# Altium PCB CTR-Dome-Rev-B.PcbDoc
Units mil, origin at the board's own origin, x right, y up, seen from the top; angles counter-clockwise.
Board outline 2755.91 x 2755.91 mil, 2 copper layers (Top Layer, Bottom Layer), stack 30.2 mil thick; 54 components, 36 nets, 180 pads, 50 vias.
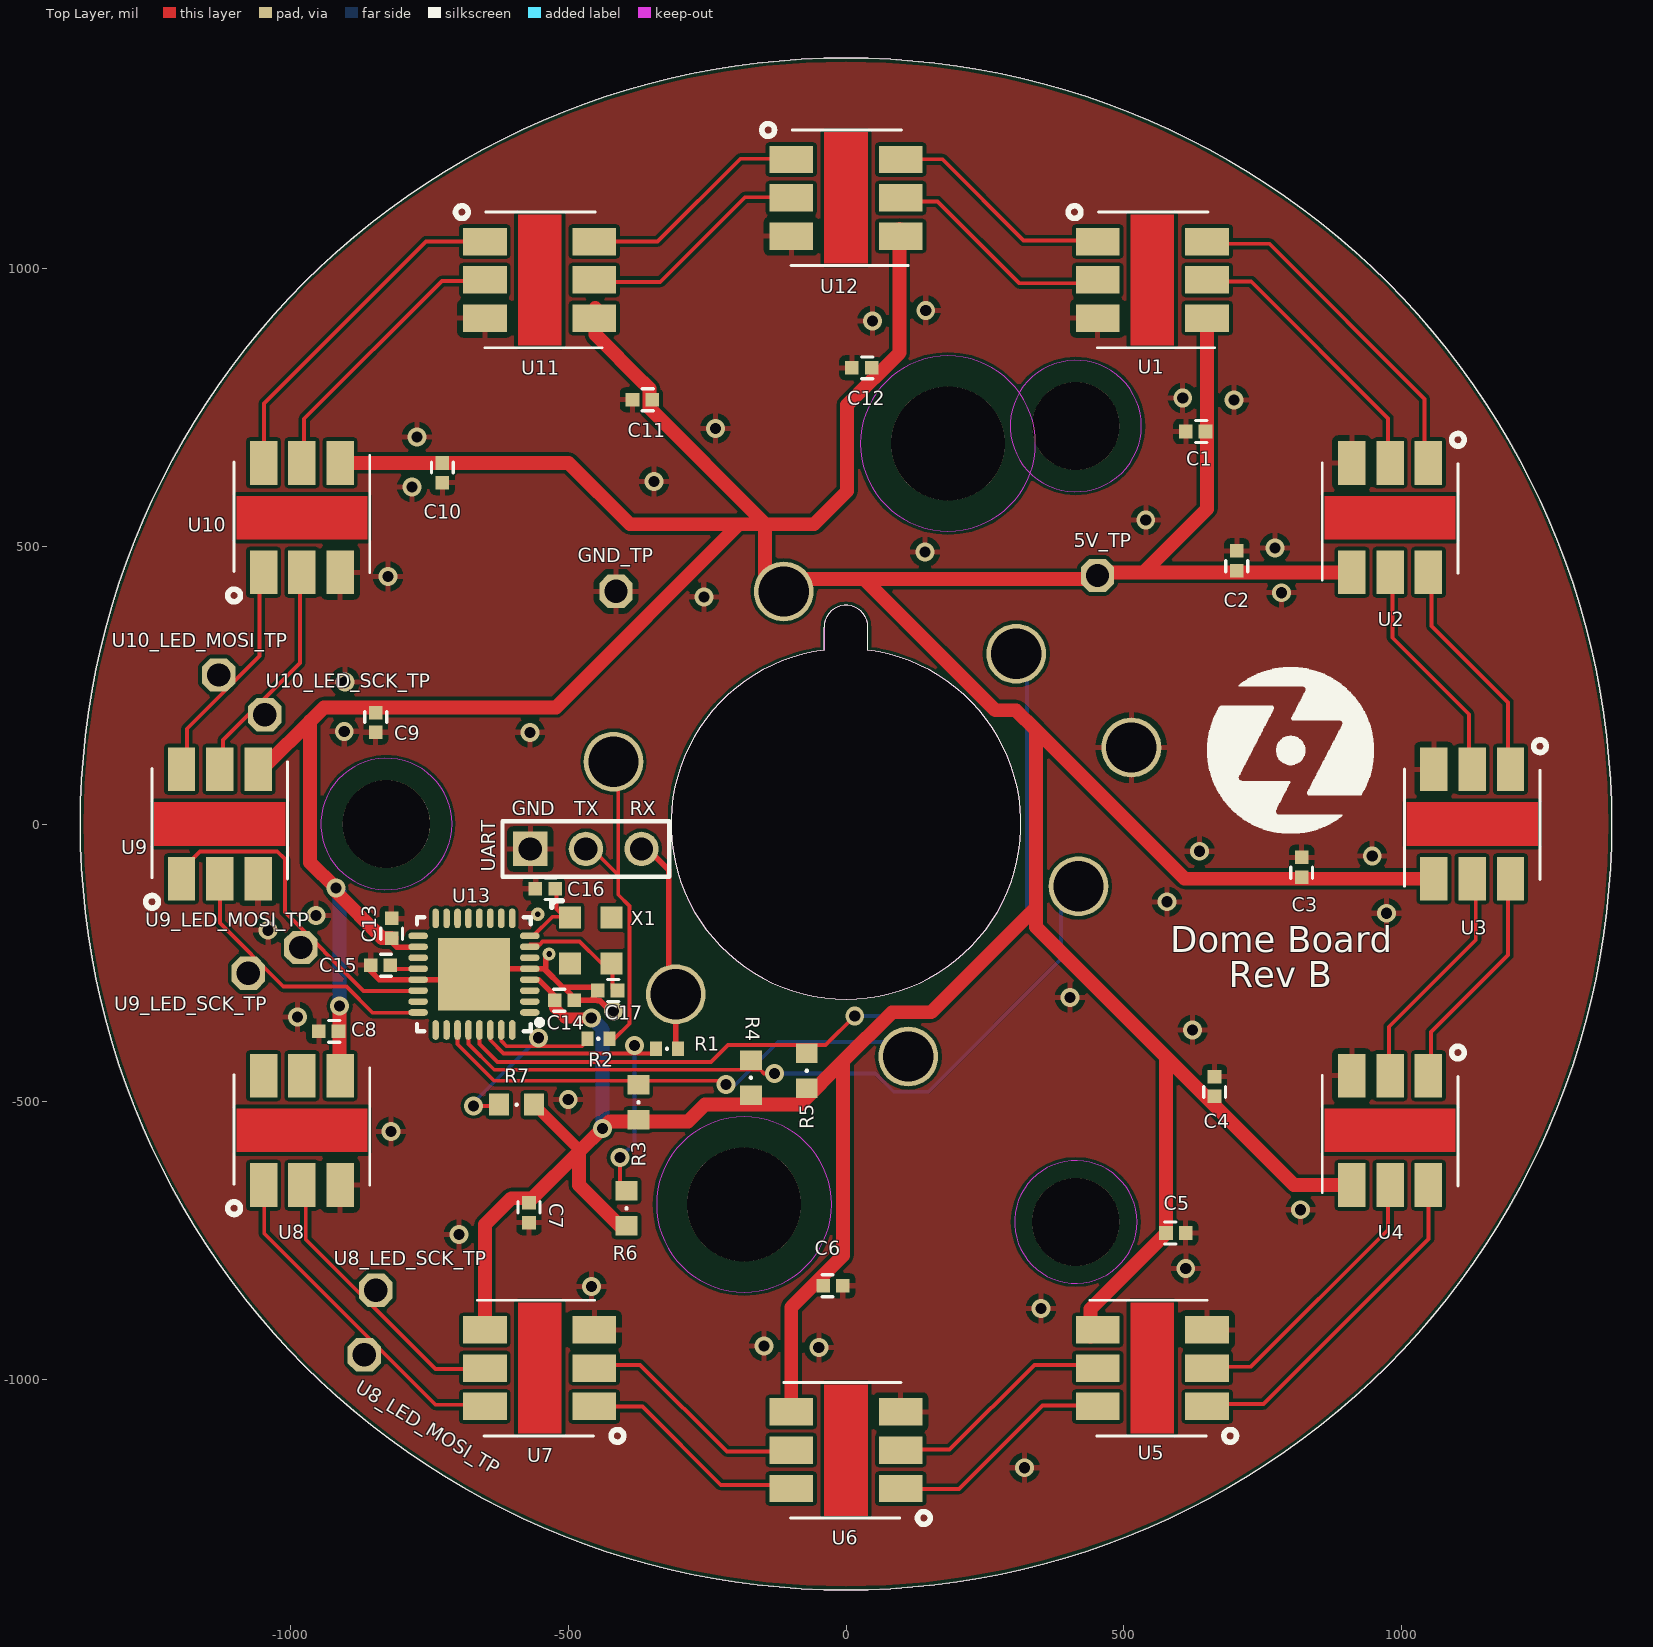
[diagram p0: Top Layer view]
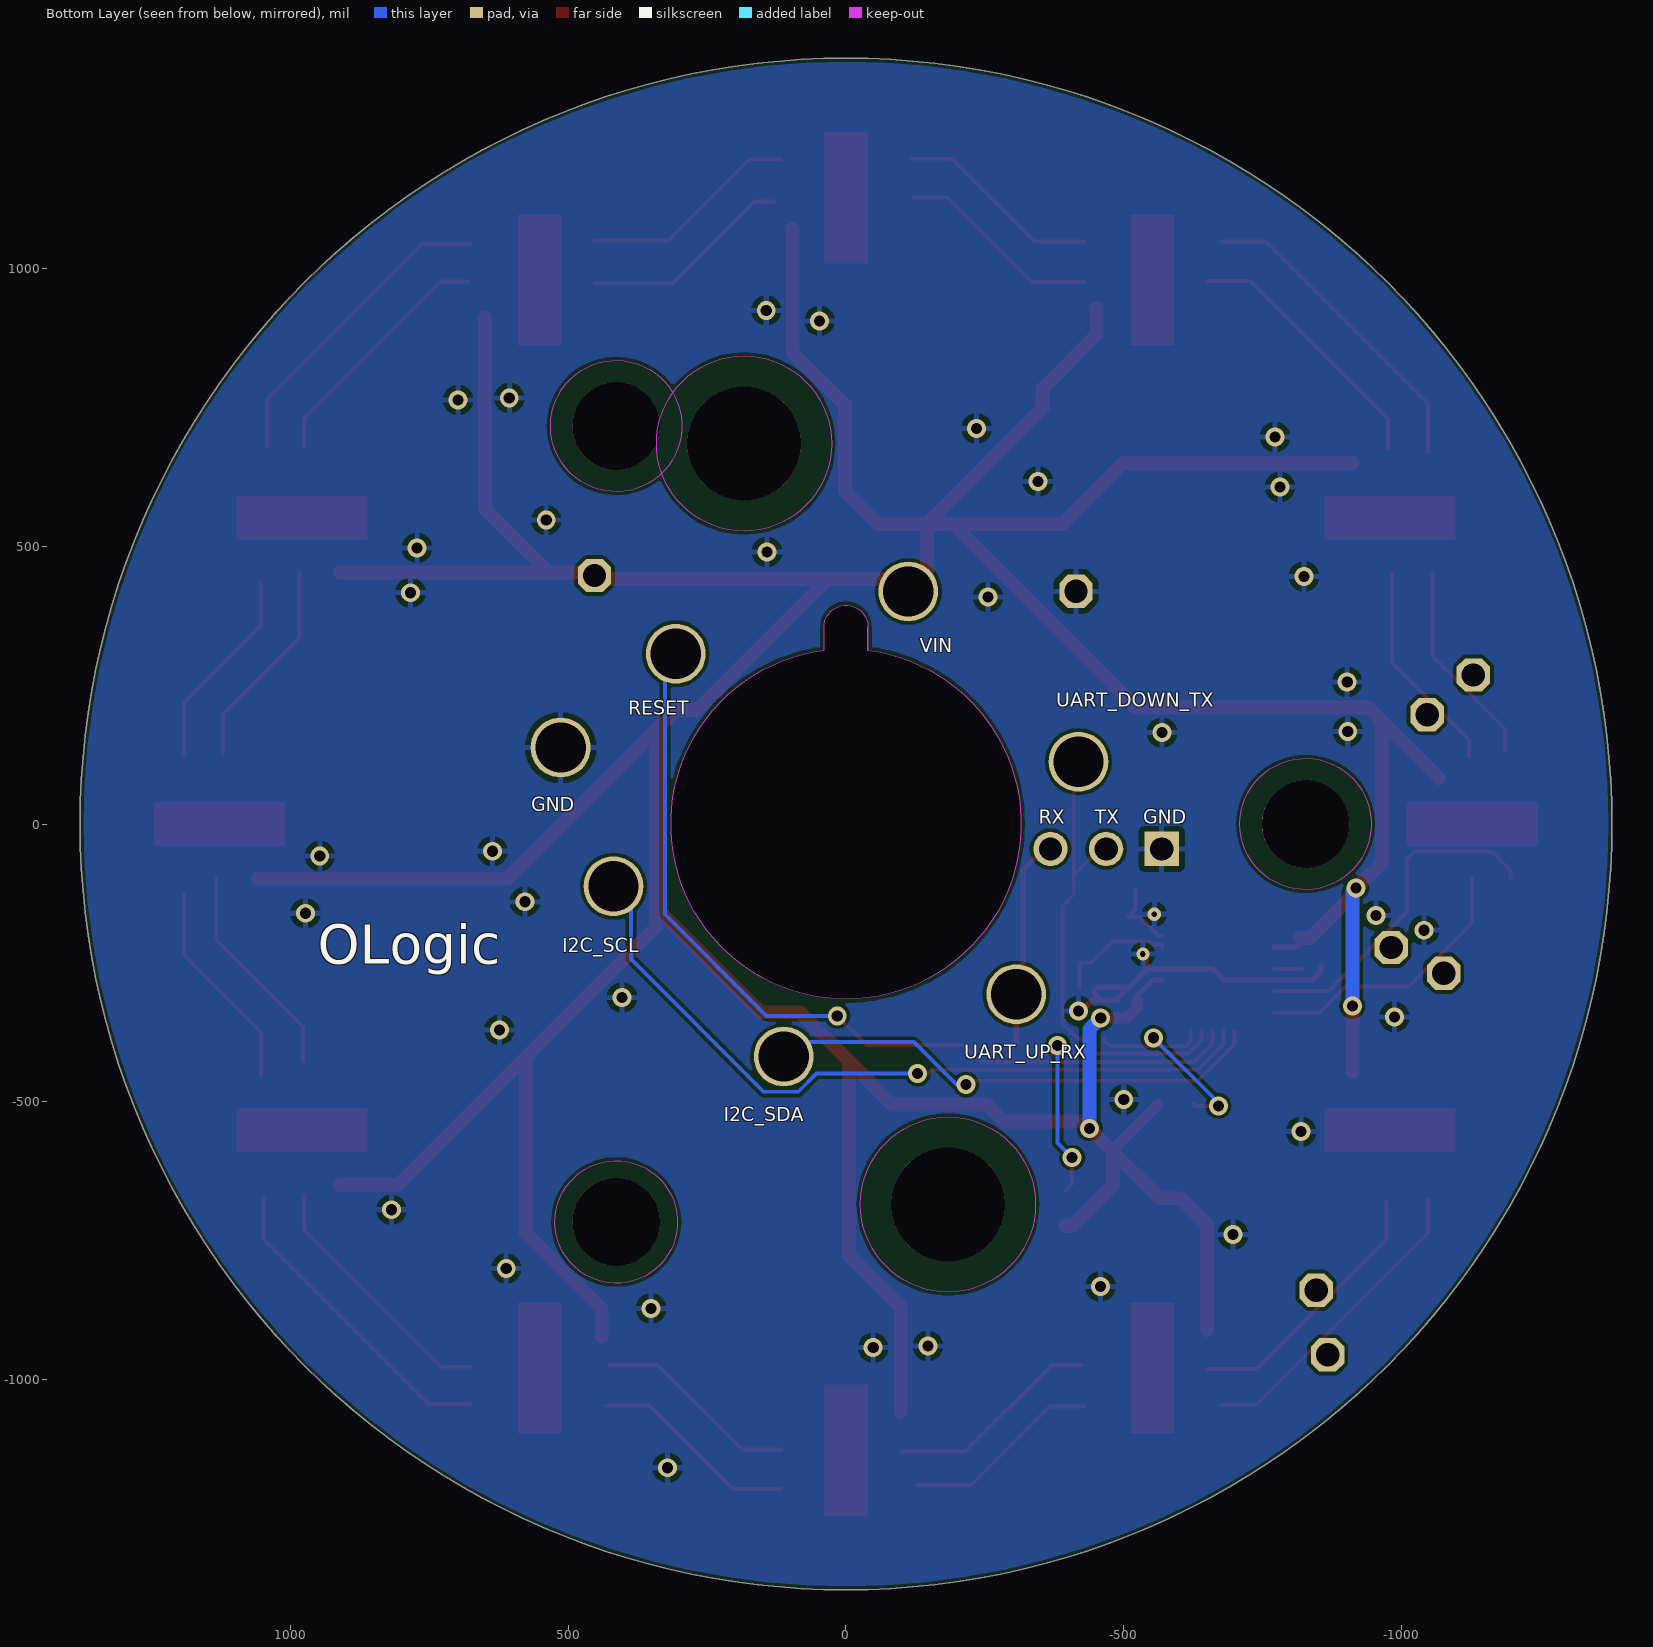
[diagram p1: Bottom Layer view, seen from below]

## Layer stack, top to bottom
Top Solder: solder mask 0.4, Solder Resist, Dk 3.5
Top Layer: signal copper 1.8
Dielectric1: core 26.6, Dk 4.2
Bottom Layer: signal copper 1.8
Bottom Solder: solder mask 0.4, Solder Resist, Dk 3.5

## Board outline
-1377.95,0 ccw(c0,0) 0,-1377.95 ccw(c0,0) 1377.95,0 ccw(c0,0) 0,1377.95 ccw(c0,0)
cut-out: -39.37,312.49 ccw(c0,0) 39.37,312.49 39.37,354.33 ccw(c0,354.33) -39.37,354.33

## Design rules (kind name [scope] priority, off if disabled: settings)
Clearance [All] p1: gap=6 ignorepadtopadclearanceinfootprint=FALSE except(0: Arc-Hole Track-Hole SMDPad-Hole THPad-Hole Via-Hole Fill-Hole Poly-Hole Region-Hole Text-Hole)
ComponentClearance ComponentClearance_BAT [InComponent('BT1') vs InComponent('CN3')] p1: gap=0 collisioncheckmode=3 verticalgap=0 showdistances=FALSE
ComponentClearance [All] p2: gap=7 collisioncheckmode=3 verticalgap=7 showdistances=FALSE
HoleSize [All] p1: absolutevalues=TRUE maxlimit=300 minlimit=10 maxpercent=80.000 minpercent=20.000
HoleToHoleClearance [All] p1: gap=7 allowstackedmicrovias=TRUE
MinimumSolderMaskSliver [InNet('VIN')] p1: minsoldermaskwidth=0.5
NetAntennae NetAntennae_ANT [InNetClass('ANT')] p1: netantennaetolerance=0
NetAntennae [All] p2: netantennaetolerance=0
PolygonConnect [All] p1: connectstyle=Relief reliefconductorwidth=10 reliefentries=4 polygonreliefangle="90 Angle" airgapwidth=10
RoutingVias [All] p1: holewidth=20 width=34 viastyle="Through Hole" minholewidth=10 minwidth=22 maxholewidth=35 maxwidth=50
SMDNeckDown [All] p1: percent=120.000
SilkToBoardRegionClearance [InNet('3.3V')] p1:
SilkToSilkClearance [All] p1: silktosilkclearance=0
SilkToSolderMaskClearance [IsPad] p1: minsilkscreentomaskgap=0 clearancetoexposedcopper=TRUE
SolderMaskExpansion [All] p1: expansion=4
Width Width_BT [InNetClass('BT')] p1: maxlimit=40 minlimit=10 preferedwidth=15
Width Width_VDD [InNet('3.3V')] p2: maxlimit=20 minlimit=7 preferedwidth=10
Width [All] p3: maxlimit=30 minlimit=6 preferedwidth=7
22 further rules are at their usual default settings.

## Classes and differential pairs
component class LED: C1 C2 C3 C4 C5 C6 C7 C8 C9 C10 C11 C12 C13 U1 U2 U3 U4 U5 U6 U7 U8 U9 U10 U11 U12

## Components (designator, comment, footprint, x,y, rotation, side; value= is the part's Value field where it differs from the comment)
5V_TP "Test Point" "TestPoint-TH 42 mil" 452.44,446.96 r90 top
C1 "1uF" CAPC0402(1005)_N 629.08,706.17 r180 top
C2 "1uF" CAPC0402(1005)_N 703.17,473.68 r90 top
C3 "1uF" CAPC0402(1005)_N 819.68,-77.87 r90 top
C4 "1uF" CAPC0402(1005)_N 663.03,-472.31 r90 top
C5 "1uF" CAPC0402(1005)_N 593.42,-735.87 r0 top
C6 "1uF" CAPC0402(1005)_N -23.57,-830.71 r0 top
C7 "1uF" CAPC0402(1005)_N -570.3,-699.44 r270 top
C8 "1uF" CAPC0402(1005)_N -930.72,-373.15 r180 top
C9 "1uF" CAPC0402(1005)_N -846.14,182.48 r270 top
C10 "1uF" CAPC0402(1005)_N -726.15,631.72 r270 top
C11 "1uF" CAPC0402(1005)_N -366.43,763.42 r180 top
C12 "1uF" CAPC0402(1005)_N 28.25,820.63 r180 top
C13 "1uF" CAPC0402(1005)_N -817.46,-187.52 r90 top
C14 "0.1uF" CAPC0402(1005)_N -506.26,-317.29 r0 top
C15 "0.1uF" CAPC0402(1005)_N -837.32,-254.02 r180 top
C16 "27pF" CAPC0402(1005)_N -541.09,-116.11 r180 top
C17 "27pF" CAPC0402(1005)_N -428.79,-299.59 r180 top
GND "Pogo Pin" POGO_PIN 513.39,137.56 r90 bottom
GND_TP "Test Point" "TestPoint-TH 42 mil" -413.7,418.51 r90 top
I2C_SCL "Pogo Pin" POGO_PIN 418.31,-112.09 r90 bottom
I2C_SDA "Pogo Pin" POGO_PIN 112.09,-418.31 r90 bottom
R1 "1K" RESC0402(1005)_N -322.03,-404.5 r0 top
R2 "1K" RESC0402(1005)_N -445.59,-386.26 r0 top
R3 "10K" RESC0603(1608)_N -373.41,-500.84 r270 top
R4 "10K" RESC0603(1608)_N -171.08,-456.4 r270 top
R5 "10K" RESC0603(1608)_N -70.57,-444.05 r270 top
R6 "10K" RESC0603(1608)_N -394.98,-691.47 r270 top
R7 "10K" RESC0603(1608)_N -592.65,-504.97 r0 top
RESET "Pogo Pin" POGO_PIN 306.22,306.22 r90 bottom
U1 "APA102" APA102C 551.18,978.89 r0 top
U2 "APA102" APA102C 978.89,551.18 r270 top
U3 "APA102" APA102C 1126.57,0 r270 top
U4 "APA102" APA102C 978.89,-551.18 r270 top
U5 "APA102" APA102C 551.18,-978.89 r180 top
U6 "APA102" APA102C 0,-1126.57 r180 top
U7 "APA102" APA102C -551.18,-978.89 r180 top
U8 "APA102" APA102C -978.9,-551.18 r90 top
U8_LED_MOSI_TP "Test Point" "TestPoint-TH 42 mil" -866.64,-955.14 r90 top
U8_LED_SCK_TP "Test Point" "TestPoint-TH 42 mil" -845.9,-838.82 r90 top
U9 "APA102" APA102C -1126.57,0 r90 top
U9_LED_MOSI_TP "Test Point" "TestPoint-TH 42 mil" -980.89,-222.3 r90 top
U9_LED_SCK_TP "Test Point" "TestPoint-TH 42 mil" -1075.32,-268.53 r90 top
U10 "APA102" APA102C -978.9,551.18 r90 top
U10_LED_MOSI_TP "Test Point" "TestPoint-TH 42 mil" -1128.62,268.17 r90 top
U10_LED_SCK_TP "Test Point" "TestPoint-TH 42 mil" -1045.67,196.84 r90 top
U11 "APA102" APA102C -551.18,978.89 r0 top
U12 "APA102" APA102C 0,1126.57 r0 top
U13 "ATMEGA328PB 8-bit 20MHz 1.8V ~ 5.5V" "QFN 32 (VFQFN ATMEL ATMEGA)" -669.41,-270.2 r180 top
UART "Header 3" HDR1X3 -567.93,-44.93 r0 top
UART_DOWN_TX "Pogo Pin" POGO_PIN -418.31,112.09 r90 bottom
UART_UP_RX "Pogo Pin" POGO_PIN -306.22,-306.22 r90 bottom
VIN "Pogo Pin" POGO_PIN -112.09,418.31 r90 bottom
X1 "16MHz ±50ppm" SMXOSC/3.2X2.5 -496.44,-168.17 r270 top

## Footprints (in the part's own frame and the unit in brackets; to place one, negate y for a bottom-side part, rotate by r counter-clockwise, add the part's x,y. Pads: shape width x height; smd on the part's side, far side on the other; paste and mask are expansions set on the pad)
APA102C [mm] "APA102C RGB LED"
  rect 2x1.25 smd: 1(-2.5,1.75) 2(-2.5,0) 3(-2.5,-1.75) 4(2.5,-1.75) 5(2.5,0) 6(2.5,1.75)
  Top Layer region: -1,-3 1,-3 1,3 -1,3
  silkscreen extent -3.84,-3.1 2.84,3.39, body extent -2.5,-2.47 2.85,2.47, height 1.7
CAPC0402(1005)_N [mm] "Chip Capacitor, Body 1.0x0.5mm, Height 0.7mm, IPC Medium Density"
  rect 0.62x0.62 smd: 1(-0.45,0) 2(0.45,0)
  silkscreen extent -0.5,-0.5 0,0.5, body extent -0.55,-0.3 0.55,0.3, height 0.7
HDR1X3 [mil]
  rect 62x62 hole 42: 1(0,0)
  round 62 hole 42: 2(100,0) 3(200,0)
  silkscreen extent -50,-50 250,50, body extent -50,-51 250,49, height 330
POGO_PIN [mm] "Through-hole pogo pin"
  round 2.737 hole 2.3: 1(0,0)
  body extent -1.92,-1.94 1.96,1.94, height 5.59
"QFN 32 (VFQFN ATMEL ATMEGA)" [mm] "32-Pin Quad Flat No-Lead 0.5 mm Pitch, IPC Low Density"
  oval 0.9x0.3 smd: 1(-2.55,1.75) 2(-2.55,1.25) 3(-2.55,0.75) 4(-2.55,0.25) 5(-2.55,-0.25) 6(-2.55,-0.75) 7(-2.55,-1.25) 8(-2.55,-1.75) 17(2.55,-1.75) 18(2.55,-1.25) 19(2.55,-0.75) 20(2.55,-0.25) 21(2.55,0.25) 22(2.55,0.75) 23(2.55,1.25) 24(2.55,1.75)
  oval 0.3x0.9 smd: 9(-1.75,-2.55) 10(-1.25,-2.55) 11(-0.75,-2.55) 12(-0.25,-2.55) 13(0.25,-2.55) 14(0.75,-2.55) 15(1.25,-2.55) 16(1.75,-2.55) 25(1.75,2.55) 26(1.25,2.55) 27(0.75,2.55) 28(0.25,2.55) 29(-0.25,2.55) 30(-0.75,2.55) 31(-1.25,2.55) 32(-1.75,2.55)
  rect 3.3x3.3 smd: 33(0,0)
  silkscreen extent -3.13,-2.6 2.6,2.6, body extent -2.58,-2.58 2.58,2.58, height 0.8
RESC0402(1005)_N [mm] "Chip Resistor, Body 1.0x0.5mm, IPC Medium Density"
  rect 0.55x0.65 smd: 1(-0.5,0) 2(0.5,0)
  silkscreen extent -0.05,-0.05 0.05,0.05, body extent -0.52,-0.27 0.53,0.28, height 0.4
RESC0603(1608)_N [mm] "Chip Resistor, Body 1.6x0.8mm, IPC Medium Density"
  rect 0.9x1 smd: 1(-0.8,0) 2(0.8,0)
  silkscreen extent -0.05,-0.05 0.05,0.05, body extent -0.8,-0.43 0.8,0.43, height 0.51
SMXOSC/3.2X2.5 [mm] "SM 3.2x2.5mm Crystal"
  rect 1x1 smd: 1(0,0) 2(2.1,0) 3(2.1,1.9) 4(0,1.9)
  silkscreen extent -0.76,-0.84 -0.46,-0.36, body extent -0.53,-0.3 2.67,2.2, height 0.85
"TestPoint-TH 42 mil" [mil] "Test Point - Thru-Hole 42 mil"
  oct 60x60 hole 42: 1(0,0)

## Part data
5V_TP GND_TP U8_LED_MOSI_TP U8_LED_SCK_TP U9_LED_MOSI_TP U9_LED_SCK_TP U10_LED_MOSI_TP U10_LED_SCK_TP: library part "TestPoint, small"
C1 C2 C3 C4 C5 C6 C7 C8 C9 C10 C11 C12: library part "CAP CER 1UF 16V 10% X5R 0402", "1UF 0402", Capacitance=1.0µF, Manufacturer="TDK Corporation", Manufacturer Part Number=C1005X5R1C105K050BC, Operating Temperature="-55°C ~ 85°C", Package / Case="0402 (1005 Metric)", Ratings=-, Supplier Part Number 1=445-4978-1-ND, Temperature Coefficient=X5R, Tolerance=±10%, Voltage - Rated=16V, Applications="General Purpose", Category=Capacitors, ClassName=LED, ComponentLink1Description=http://product.tdk.com/en/catalog/datasheets/mlcc_commercial_general_en.pdf, ComponentLink1URL=http://product.tdk.com/en/catalog/datasheets/mlcc_commercial_general_en.pdf, Features=-, Height - Seated (Max)=-, Lead Spacing=-, Lead Style=-, Mounting Type="Surface Mount, MLCC", Packaging="Cut Tape (CT)", Pricing 1="1=0.12, 10=0.08, 100=0.038, 250=0.032, 500=0.0268, 1000=0.022, 5000=0.0186 (USD)", RoHS="RoHS Compliant", Size / Dimension="0.039\" L x 0.020\" W (1.00mm x 0.50mm)", Stock 1=490204, Supplier 1=Digi-Key, Thickness (Max)="0.022\" (0.55mm)"
C13: library part "CAP CER 1UF 16V 10% X5R 0402", "1UF 0402", Capacitance=1.0µF, Manufacturer="TDK Corporation", Manufacturer Part Number=C1005X5R1C105K050BC, Operating Temperature="-55°C ~ 85°C", Package / Case=0402, Ratings=-, Supplier Part Number 1=445-4978-1-ND, Temperature Coefficient=X5R, Tolerance=±10%, Voltage - Rated=16V, Applications="General Purpose", Category=Capacitors, ClassName=LED, ComponentLink1Description=http://product.tdk.com/en/catalog/datasheets/mlcc_commercial_general_en.pdf, ComponentLink1URL=http://product.tdk.com/en/catalog/datasheets/mlcc_commercial_general_en.pdf, Features=-, Height - Seated (Max)=-, Lead Spacing=-, Lead Style=-, Mounting Type="Surface Mount, MLCC", Packaging="Cut Tape (CT)", Pricing 1="1=0.12, 10=0.08, 100=0.038, 250=0.032, 500=0.0268, 1000=0.022, 5000=0.0186 (USD)", RoHS="RoHS Compliant", Size / Dimension="0.039\" L x 0.020\" W (1.00mm x 0.50mm)", Stock 1=490204, Supplier 1=Digi-Key, Thickness (Max)="0.022\" (0.55mm)"
C14 C15: library part "CAP CER 0.1UF 16V 10% X5R 0402", "0.1uF 0402 16V", Capacitance=0.1µF, Manufacturer="Taiyo Yuden", Manufacturer Part Number=EMK105BJ104KV-F, Operating Temperature="-55°C ~ 85°C", Package / Case=0402, Ratings=-, Supplier Part Number 1=587-1226-2-ND, Temperature Coefficient=X5R, Tolerance=±10%, Voltage - Rated=16V, Applications="General Purpose", Category=Capacitors, ComponentLink1Description=http://www.yuden.co.jp/or/product/category/capacitor/EMK105BJ104KV-F.pdf, ComponentLink1URL=http://www.yuden.co.jp/or/product/category/capacitor/EMK105BJ104KV-F.pdf, Features=-, Height - Seated (Max)=-, Lead Spacing=-, Lead Style=-, Mounting Type="Surface Mount, MLCC", Packaging="Tape & Reel (TR)", Pricing 1="10000=0.0042, 20000=0.004, 30000=0.0038, 50000=0.0034 (USD)", RoHS="RoHS Compliant", Size / Dimension="0.039\" L x 0.020\" W (1.00mm x 0.50mm)", Stock 1=590000, Supplier 1=Digi-Key, Thickness (Max)="0.022\" (0.55mm)"
C16 C17: library part "CAP CER 27PF 50V C0G/NP0 0402", "27PF ±5% 50V 0402", Manufacturer="Samsung Electro-Mechanics America, Inc.", Manufacturer Part Number=CL05C270JB5NNNC, Operating Temperature="-55°C ~ 125°C", Package / Case="0402 (1005 Metric)", Ratings=-, Supplier Part Number 1=1276-1153-1-ND, Temperature Coefficient="C0G, NP0", Tolerance=±5%, Voltage - Rated=50V, Applications="General Purpose", Capacitance=27pF, Category=Capacitors, ComponentLink1Description=http://www.samsungsem.com/kr/support/product-search/mlcc/CL05C270JB5NNNC.jsp, ComponentLink1URL=http://www.samsungsem.com/kr/support/product-search/mlcc/CL05C270JB5NNNC.jsp, Features=-, Height - Seated (Max)=-, Lead Spacing=-, Lead Style=-, Mounting Type="Surface Mount, MLCC", Packaging="Cut Tape (CT)", Part Status=Active, Pricing 1="1=0.1, 10=0.012, 25=0.0088, 50=0.0066, 100=0.0055, 250=0.00456, 500=0.0039, 1000=0.00306, 5000=0.00256 (USD)", RoHS="RoHS Compliant", Size / Dimension="0.039\" L x 0.020\" W (1.00mm x 0.50mm)", Stock 1=380291, Supplier 1=Digi-Key, Thickness (Max)="0.022\" (0.55mm)"
GND I2C_SCL I2C_SDA RESET UART_DOWN_TX UART_UP_RX VIN: library part 0850-0-15-20-83-14-11-0, Manufacturer="Mill-Max Manufacturing Corp.", Supplier Part Number 1=ED90436-ND, Category="Connectors, Interconnects", ComponentLink1Description=http://www.mill-max.com/assets/pdfs/028.pdf, ComponentLink1URL=http://www.mill-max.com/assets/pdfs/028.pdf, Manufacturer Part Number=0850-0-15-20-83-14-11-0, Material="Copper Alloy", Mounting Type="Through Hole", Part Status=Active, Plating=Gold, Plating - Thickness="20µin (0.51µm)", Pricing 1="1=1.89, 10=1.47, 25=1.3708, 50=1.246, 100=1.1214, 250=0.94696, 500=0.89712, 1000=0.79744, 2500=0.66287 (USD)", RoHS="RoHS Compliant", Stock 1=38651, Supplier 1=Digi-Key
R1 R2: library part "RES 1K OHM 1% 1/10W 0402", "1K 0402", Manufacturer="Panasonic Electronic Components", Manufacturer Part Number=ERJ-2RKF1001X, Operating Temperature="-55°C ~ 155°C", Package / Case="0402 (1005 Metric)", Power (Watts)="0.1W, 1/10W", Resistance (Ohms)=1k, Supplier Device Package=0402, Supplier Part Number 1=P1.00KLCT-ND, Temperature Coefficient=±100ppm/°C, Tolerance=±1%, Category=Resistors, ComponentLink1Description=http://industrial.panasonic.com/www-cgi/jvcr13pz.cgi?E+PZ+3+AOA0002+ERJ2RKF1001X+7+WW, ComponentLink1URL=http://industrial.panasonic.com/www-cgi/jvcr13pz.cgi?E+PZ+3+AOA0002+ERJ2RKF1001X+7+WW, Composition="Thick Film", Creator=osman, Features="Automotive AEC-Q200", Height="0.016\" (0.40mm)", Number of Terminations=2, Packaging="Cut Tape (CT)", Pricing 1="1=0.1, 50=0.0196, 100=0.0149, 250=0.01104, 500=0.00816, 1000=0.00544, 5000=0.00383 (USD)", RoHS="RoHS Compliant", Size / Dimension="0.039\" L x 0.020\" W (1.00mm x 0.50mm)", Stock 1=3895934, Supplier 1=Digi-Key
R3 R4 R5 R6 R7: library part "RES 10K OHM 1/10W 5% 0603 SMD", "10K 0603", Manufacturer="Panasonic Electronic Components", Manufacturer Part Number=ERJ-3GEYJ103V, Package / Case="0603 (1608 Metric)", Power (Watts)="0.1W, 1/10W", Resistance (Ohms)=10k, Supplier Device Package=0603, Supplier Part Number 1=P10KGCT-ND, Temperature Coefficient=±200ppm/°C, Tolerance=±5%, Category=Resistors, ComponentLink1Description=http://industrial.panasonic.com/www-cgi/jvcr13pz.cgi?E+PZ+3+AOA0001+ERJ3GEYJ103V+7+WW, ComponentLink1URL=http://industrial.panasonic.com/www-cgi/jvcr13pz.cgi?E+PZ+3+AOA0001+ERJ3GEYJ103V+7+WW, Composition="Thick Film", Features=-, Height="0.022\" (0.55mm)", Number of Terminations=2, Packaging="Cut Tape (CT)", Pricing 1="1=0.1, 50=0.0126, 100=0.0096, 250=0.00716, 500=0.00528, 1000=0.00352, 2500=0.00297 (USD)", RoHS="RoHS Compliant", Size / Dimension="0.063\" L x 0.031\" W (1.60mm x 0.80mm)", Stock 1=4724855, Supplier 1=Digi-Key
U1 U2 U3 U4 U5 U6 U7 U8 U9 U10 U11 U12: "APA102 RGB LED with serial controller", Manufacturer="Shiji Lighting", MPN=APA102C, ClassName=LED
U13: library part ATMEGA328PB-AU, "AVR ATmega Microcontroller IC 8-Bit 20MHz 32KB (16K x 16) FLASH 32-VFQFN (5x5)", Manufacturer=Atmel, Operating Temperature="-40°C ~ 85°C (TA)", Package / Case=32-TQFP, Supplier Device Package="32-TQFP (7x7)", Supplier Part Number 1=ATMEGA328PB-AU-ND, Voltage - Supply (Vcc/Vdd)="1.8 V ~ 5.5 V", Category="Integrated Circuits (ICs)", ComponentLink1Description=http://www.atmel.com/images/atmel-42397-8-bit-avr-microcontroller-atmega328pb_summary.pdf, ComponentLink1URL=http://www.atmel.com/images/atmel-42397-8-bit-avr-microcontroller-atmega328pb_summary.pdf, ComponentLink2Description=http://www.farnell.com/datasheets/2014286.pdf, ComponentLink2URL=http://www.farnell.com/datasheets/2014286.pdf, Connectivity="I²C, SPI, UART/USART", Core Processor=AVR, Core Size=8-Bit, Data Converters="A/D 8x10b", EEPROM Size="1K x 8", Family="Embedded - Microcontrollers", Manufacturer Part Number=ATMEGA328PB-AU, Number of I/O=27, Oscillator Type=Internal, Packaging=Tray, Peripherals="Brown-out Detect/Reset, POR, PWM, WDT", Pricing 1="1=1.38, 25=1.2668, 100=1.1536 (USD)", Program Memory Size="32KB (16K x 16)", Program Memory Type=FLASH, RAM Size="2K x 8", Series="AVR® ATmega", Speed=20MHz, Stock 1=4992, Supplier 1=Digikey
UART: "Header, 3-Pin", Color=Black, Manufacturer="Sullins Connector Solutions", Manufacturer Part Number=PRPC003SAAN-RC, Supplier Part Number 1=S1011EC-03-ND, Category="Connectors, Interconnects", ComponentLink1Description=http://media.digikey.com/PDF/Data%20Sheets/Sullins%20PDFs/xRxCzzzSxxN-RC_ST_11635-B.pdf, ComponentLink1URL=http://media.digikey.com/PDF/Data%20Sheets/Sullins%20PDFs/xRxCzzzSxxN-RC_ST_11635-B.pdf, Connector Type="Header, Unshrouded, Breakaway", Contact Finish=Gold, Contact Finish Thickness=Flash, Contact Mating Length="0.230\" (5.84mm)", Contact Type="Male Pin", Fastening Type=-, Features=-, Mounting Type="Through Hole", Number of Positions=3, Number of Positions Loaded=All, Number of Rows=1, Packaging=Bulk, Pitch="0.100\" (2.54mm)", Pricing 1="1=0.18, 10=0.16, 100=0.132, 500=0.10438, 1000=0.0896, 5000=0.08174, 10000=0.0786 (USD)", RoHS="RoHS Compliant", Row Spacing=-, Stock 1=0, Supplier 1=Digi-Key, Termination=Solder
X1: library part "CRYSTAL 16.0000MHZ 18PF 4-SMD", "16MHz ±50ppm Crystal 18pF 80 Ohm -20°C ~ 70°C Surface Mount 4-SMD, No Lead", ESR (Equivalent Series Resistance)="80 Ohm", Frequency=16MHz, Frequency Stability=±30ppm, Frequency Tolerance=±50ppm, Load Capacitance=18pF, Manufacturer=EPSON, Manufacturer Part Number="FA-238 16.0000MB-C3", Operating Mode=Fundamental, Operating Temperature="-20°C ~ 70°C", Package / Case="4-SMD, No Lead", Ratings=-, Supplier Part Number 1=SER3686CT-ND, Category="Crystals, Oscillators, Resonators", ComponentLink1Description=https://support.epson.biz/td/api/doc_check.php?dl=brief_FA-238V_en.pdf, ComponentLink1URL=https://support.epson.biz/td/api/doc_check.php?dl=brief_FA-238V_en.pdf, Height - Seated (Max)="0.028\" (0.70mm)", Mounting Type="Surface Mount", Packaging="Cut Tape (CT)", Part Status=Active, Pricing 1="1=0.43, 10=0.358, 50=0.3218, 100=0.286 (USD)", RoHS="RoHS Compliant", Size / Dimension="0.126\" L x 0.098\" W (3.20mm x 2.50mm)", Stock 1=2934, Supplier 1=Digi-Key, Supplier 2=Digi-Key, Supplier Part Number 2=SER3686TR-ND, Type="MHz Crystal"

## Free pads (board coordinates)
  round 157.48 hole 157.48 unplated: 1(-826.77,0) 1(413.39,-716.02) 1(413.39,716.02)
  round 204.72 hole 204.72 unplated: 1(-183.43,-684.53) 1(183.43,684.53)

## Via types
v1: diameter 34, hole 20, Top Layer to Bottom Layer, tented both sides, 48 vias
v2: diameter 24, hole 10, Top Layer to Bottom Layer, tented both sides, 2 vias

## Nets (pads, with @x,y where several pads share a name; then routed paths per layer and width w, separated by ;. In a path a pad name is that pad's centre, name@x,y a point inside that pad or via, vN(x,y) a via of type N, cw(c..) or ccw(c..) an arc to the next point about the centre after c; other vN are vias at no path point)
5V: 5V_TP.1 C1.1 C2.1 C3.1 C4.1 C5.1 C6.1 C7.1 C8.1 C9.1 C10.1 C11.1 C12.1 C13.1 C14.1 R3.2 R4.2 R5.2 R6.2 R7.2 U1.4 U2.4 U3.4 U4.4 U5.4 U6.4 U7.4 U8.4 U9.4 U10.4 U11.4 U12.4 U13.4 U13.18 VIN.1 | length 11265.3
  Top Layer w10: C13.1@-820.65,-209.13 -808.38,-221.4 U13.18@-769.76,-221.4 ; U13.4@-568.97,-280.45 -552.53,-280.45 C14.1@-521.43,-311.55 ; v1@-464.56,-339.51 -458.23,-345.84 v1(-458.23,-349.23)
  Top Layer w20: R7.2 -480.17,-585.95 -480.17,-589.65 ; C14.1 -523.98,-331.24 -505.99,-349.23 v1(-458.23,-349.23)
  Top Layer w25: U9.4@-1066.75,82.5 -939.37,209.88 -522.01,209.88 -192.62,539.28 ; -964.29,184.96 -964.29,-68.98 v1(-917.84,-115.43) -917.84,-121.9 -834.51,-205.24 C13.1 ; U8.4@-911.01,-446.36 v1(-911.01,-327.5) ; U10.4 -498.89,649.61 -388.56,539.28 -192.62,539.28 ; U7.4 -649.61,-720.71 -602.15,-673.25 ; -591.97,-673.25 -602.15,-673.25 ; U11.4@-451.07,928.84 -451.07,880.33 -364.87,794.13 -364.28,794.13 -353.44,783.29 -353.44,748.02 -150.66,545.24 ; R6.2 -406.39,-722.97 -480.17,-649.19 -480.17,-589.65 ; U6.4 -98.43,-869.37 -5.05,-775.99 -5.05,-426.64 ; U12.4@96.26,1070.59 96.26,847.79 1.98,753.52 1.98,598.67 -57.41,539.28 -145.71,539.28 ; 344.47,166.32 609.22,-98.43 U3.4 ; U5.4@440.11,-922.35 440.11,-872.59 575.71,-737 C5.1 575.71,-419 ; 5V_TP.1 446.24,440.77 32.53,440.77 ; 5V_TP.1@452.76,452.76 535.36,452.76 ; U1.4 649.61,567 535.36,452.76 ; U4.4 806.31,-649.61 575.71,-419 ; U2.4 535.36,452.76 ; -602.15,-673.25 -563.77,-673.25 -480.17,-589.65 ; -480.17,-589.65 v1(-438.24,-547.72) -425.5,-534.99 -284.32,-534.99 -253.83,-504.5 -82.91,-504.5 -5.05,-426.64 ; -192.62,539.28 -145.71,539.28 ; -145.71,539.28 -145.71,451.93 VIN.1 -89.62,440.77 32.53,440.77 ; -5.05,-426.64 82.86,-338.73 153.22,-338.73 342.09,-149.85 ; 32.53,440.77 268.73,204.57 306.22,204.57 342.09,168.7 342.09,-149.85 ; 342.09,-149.85 342.09,-185.39 575.71,-419
  Bottom Layer w25: v1(-917.84,-115.43) -911.01,-122.27 v1(-911.01,-327.5) ; v1(-458.23,-349.23) -438.24,-369.22 v1(-438.24,-547.72)
GND: C1.2 C2.2 C3.2 C4.2 C5.2 C6.2 C7.2 C8.2 C9.2 C10.2 C11.2 C12.2 C13.2 C14.2 C15.2 C16.2 C17.2 GND.1 GND_TP.1 U1.3 U2.3 U3.3 U4.3 U5.3 U6.3 U7.3 U8.3 U9.3 U10.3 U11.3 U12.3 U13.5 U13.21 U13.33 UART.1 | length 603.5
  Top Layer w10: C15.2 -855.04,-264.77 -839.36,-280.45 U13.21@-769.76,-280.45 ; U13.21 -679.25,-280.04 U13.33 -659.57,-260.35 U13.5 -542.91,-260.35 ; v2(-534.21,-233.92) -540.3,-240.01 -540.3,-257.74 -542.91,-260.35 ; v1@-426.4,-334.15 -442.52,-318.03 -446.51,-318.03 -447.24,-317.29 -459.61,-317.29 ; -542.91,-260.35 -509.18,-294.08 -507.22,-294.08 ; -507.22,-294.08 -452.01,-294.08 C17.2 -446.51,-304.18 -459.61,-317.29 ; -507.22,-294.08 -488.54,-312.75 C14.2 -459.61,-317.29
  other v1: 320.97,-1158.18 -48.93,-942.09 -147.33,-939.1 350.75,-871.57 -457.73,-832.12 611.3,-799.6 -696.32,-738.54 817.93,-693.98 -818.89,-553.5 -499.75,-495.7 623.71,-370.31 -986.51,-347.42 -418.23,-336.31 402.86,-311.99 -1039.71,-191.07 -953.56,-164.46 972.46,-160.56 577.71,-139.96 946.72,-57.58 636.06,-49 -568.43,164.39 -902.68,166.31 -901.7,255.45 -255.5,408.53 783.67,416.12 -824.19,445.35 142.3,489.54 771.65,496.78 539.34,546.6 -780.6,606.16 -345.53,616.25 -771.88,696.26 -234.88,711.62 697.85,762.81 605.79,766.52 47.37,905.26 143.49,924.14
  other v2: -554.74,-162.38
I2C_SCL: I2C_SCL.1 R4.1 U13.28 | length 1369.2
  Top Layer w7: U13.28@-679.2,-371 -679.2,-395.75 -632.83,-442.12 -154.24,-442.12 -147.39,-448.97 v1(-128.71,-448.97)
  Bottom Layer w7: v1(-128.71,-448.97) 53.12,-448.97 85.83,-481.69 148.14,-481.69 386.91,-242.92 386.91,-143.49 I2C_SCL.1
I2C_SDA: I2C_SDA.1 R3.1 U13.27 | length 906.9
  Top Layer w7: U13.27@-698.73,-372.67 -698.73,-396.28 -633.03,-461.97 -223,-461.97 v1(-215.97,-469)
  Bottom Layer w7: v1(-215.97,-469) -198.49,-469 -122.01,-392.52 86.3,-392.52 I2C_SDA.1
LED_MOSI: U9.1 U9_LED_MOSI_TP.1 U13.22 | length 614.5
  Top Layer w7: U9.1 -1195.47,-83.14 -1161.88,-49.56 -1023.21,-49.56 -1009.59,-63.17 -1009.59,-158.41 -867.87,-300.14 U13.22@-769.76,-300.14
LED_SCK: U9.2 U9_LED_SCK_TP.1 U13.24 | length 503.6
  Top Layer w7: U9.2 -1126.57,-178.45 -1012.39,-292.63 -898.98,-292.63 -852.1,-339.51 U13.24@-769.76,-339.51
NetC15_1: C15.1 U13.20 | length 50
  Top Layer w7: C15.1@-819.67,-260.47 -819.37,-260.77 U13.20@-769.76,-260.77
NetC16_1: C16.1 U13.8 X1.1 | length 130.1
  Top Layer w7: U13.8 -562.78,-201.3 -528.39,-166.91 -507.08,-166.91 -520.82,-153.16 C16.1@-520.82,-118.64
NetC17_1: C17.1 U13.7 X1.3 | length 217.9
  Top Layer w7: U13.7 -569.02,-216.7 -550.82,-216.7 -545.7,-211.58 -479.12,-211.58 -441.11,-249.58 -419.8,-249.58 C17.1@-419.8,-296.16
NetR1_1: R1.1 R6.1 U13.30 | length 598.3
  Top Layer w7: U13.30@-639.83,-371 -639.83,-388.97 -615.97,-412.84 R1.1@-346.23,-412.84 ; v1(-406.85,-600.28) -406.85,-648.11 R6.1
  Bottom Layer w7: v1(-406.85,-600.28) -380.82,-574.25 v1(-380.82,-398.84)
NetR2_1: R2.1 R7.1 U13.31 | length 405.1
  Top Layer w7: v1(-670.01,-507.19) -629.33,-507.19 -625.62,-503.49 R7.1 ; U13.31@-620.15,-371 -620.15,-390.27 -610.58,-399.84 -474.58,-399.84 -465.28,-390.53 R2.1
  Bottom Layer w7: v1(-670.01,-507.19) -670.01,-501.43 v1(-553.23,-384.66)
NetU1_1: U1.1 U12.6 | length 395.4
  Top Layer w7: U12.6@117.97,1196.05 173.2,1196.05 319.61,1049.64 U1.1@452.76,1049.64
NetU1_2: U1.2 U12.5 | length 385.5
  Top Layer w7: U12.5@128.26,1120.04 164.54,1120.04 311.81,972.78 U1.2@452.76,972.78
NetU1_5: U1.5 U2.2 | length 449.7
  Top Layer w7: U1.5@679.27,976.14 729.01,976.14 975.33,729.83 U2.2@975.33,678.22
NetU1_6: U1.6 U2.1 | length 566.6
  Top Layer w7: U1.6@674.81,1044.03 761.52,1044.03 1040.62,764.93 U2.1@1040.62,679.74
NetU2_5: U2.5 U3.2 | length 383.8
  Top Layer w7: U2.5@982.99,452.76 982.99,335.12 1120.7,197.41 U3.2@1120.7,126.01
NetU2_6: U2.6 U3.1 | length 370
  Top Layer w7: U2.6@1053.37,435.36 1053.37,356.32 1191.08,218.6 U3.1@1191.08,122.45
NetU3_5: U3.5 U4.2 | length 392.4
  Top Layer w7: U4.2@976.87,-426.19 976.87,-364.73 1132.94,-208.65 U3.5@1132.94,-98.43
NetU3_6: U3.6 U4.1 | length 386.7
  Top Layer w7: U4.1@1052.36,-452.76 1052.36,-374.45 1191.08,-235.73 U3.6@1191.08,-123.47
NetU4_5: U4.5 U5.2 | length 464.7
  Top Layer w7: U5.2@674.84,-976.38 728.93,-976.38 975.34,-729.97 U4.5@975.34,-667.87
NetU4_6: U4.6 U5.1 | length 569
  Top Layer w7: U5.1@676.51,-1043.7 751.09,-1043.7 1048.27,-746.53 U4.6@1048.27,-672.38
NetU5_5: U5.5 U6.2 | length 372.7
  Top Layer w7: U6.2@116.37,-1125.61 186.33,-1125.61 338.93,-973.01 U5.5@425.84,-973.01
NetU5_6: U5.6 U6.1 | length 377.4
  Top Layer w7: U6.1@116.92,-1196.32 203.31,-1196.32 353.67,-1045.95 U5.6@432.01,-1045.95
NetU6_5: U6.5 U7.2 | length 390.1
  Top Layer w7: U7.2@-423.87,-973 -370.37,-973 -214.39,-1128.98 U6.5@-98.43,-1128.98
NetU6_6: U6.6 U7.1 | length 360
  Top Layer w7: U7.1@-429.19,-1048.19 -366.09,-1048.19 -225.27,-1189.02 U6.6@-127.48,-1189.02
NetU7_5: U7.5 U8.2 U8_LED_SCK_TP.1 | length 487.2
  Top Layer w7: U8.2@-972,-679.23 -972,-747.32 -738.46,-980.86 U7.5@-649.61,-980.86
NetU7_6: U7.6 U8.1 U8_LED_MOSI_TP.1 | length 561.4
  Top Layer w7: U8.1@-1046.57,-675.56 -1046.57,-736.72 -738.46,-1044.83 U7.6@-673.9,-1044.83
NetU9_5: U9.5 U10.2 U10_LED_SCK_TP.1 | length 388.3
  Top Layer w7: U9.5@-1120.81,121.7 -1120.81,151.07 -982.51,289.38 U10.2@-982.51,452.76
NetU9_6: U9.6 U10.1 U10_LED_MOSI_TP.1 | length 374.1
  Top Layer w7: U9.6@-1185.96,132.72 -1185.96,171.34 -1055.32,301.98 U10.1@-1055.32,452.76
NetU10_5: U10.5 U11.2 | length 481.5
  Top Layer w7: U10.5@-974.85,675.45 -974.85,729.02 -726.98,976.89 U11.2@-649.61,976.89
NetU10_6: U10.6 U11.1 | length 582.3
  Top Layer w7: U10.6@-1046.96,667.57 -1046.96,756.5 -755.29,1048.17 U11.1@-674.41,1048.17
NetU11_5: U11.5 U12.2 | length 371.4
  Top Layer w7: U11.5@-428.34,975.36 -334.22,975.36 -181.98,1127.61 U12.2@-119.96,1127.61
NetU11_6: U11.6 U12.1 | length 373
  Top Layer w7: U11.6@-428.48,1047.95 -339,1047.95 -190.11,1196.85 U12.1@-117.19,1196.85
RESET: R5.1 RESET.1 U13.29 | length 1610.8
  Top Layer w7: U13.29@-659.52,-371 -659.52,-396.12 -627.14,-428.5 -243.13,-428.5 -212.31,-397.69 -147.46,-397.69 -147.4,-397.74 -36.88,-397.74 v1(15.67,-345.19)
  Bottom Layer w7: v1(15.67,-345.19) 142.97,-345.19 325.72,-162.44 325.72,286.72 RESET.1
UART_RX: R1.2 UART.3 UART_UP_RX.1 | length 386
  Top Layer w10: UART.3@-368.29,-33.41 -318.52,-83.18 -318.52,-293.92 UART_UP_RX.1 R1.2@-306.22,-393.66
UART_TX: R2.2 UART.2 UART_DOWN_TX.1 | length 624.8
  Top Layer w7: UART.2@-468.29,-33.41 -409.7,-92.01 ; R2.2 -416.31,-386.26 -389.37,-359.32 -389.37,-147.63 -409.7,-127.3 -409.7,-92.01 ; UART_DOWN_TX.1 -396.63,90.41 -396.63,80.8 -409.7,67.73 -409.7,-92.01
pads on no net: U8.5 U8.6 U13.1 U13.2 U13.3 U13.6 U13.9 U13.10 U13.11 U13.12 U13.13 U13.14 U13.15 U13.16 U13.17 U13.19 U13.23 U13.25 U13.26 U13.32 X1.2 X1.4

## Polygon pours and split planes (outlines as drawn)
GND on Bottom Layer "GND_L02_P004" (solid, remove dead copper, pour order 4): -1240.31,966.3 -656.15,1550.46 -630.93,1550.46 528.95,1550.46 1382.07,697.34 1428.29,651.12 1428.29,-962.65 1129.91,-962.65 764.3,-1328.27 667.65,-1424.92 -849.46,-1424.92 -849.46,-1290.46 -1273.93,-865.99 -1492.46,-647.46 -1492.46,256.08
GND on Top Layer "GND_L01_P002" (solid, remove dead copper, pour order 2): -1464.99,1425.57 787.53,1425.57 802.22,1410.88 1463.29,749.81 1463.29,142.61 1463.29,-631.07 640.62,-1453.74 611.24,-1424.36 -1063.44,-1424.36 -1092.85,-1424.36 -1430.71,-1086.49

## Keep-outs
Keep-Out Layer:
  circle w0.5: c-826.77,0 r118.11
  circle w0.5: c183.42,684.53 r157.48
  circle w0.5: c413.39,716.02 r118.11
  circle w0.5: c413.39,-716.02 r110.24
  circle w0.5: c-183.43,-684.53 r157.48
  lines w1: -1377.95,0 ccw(c0,0) 0,-1377.95 ccw(c0,0) 1377.95,0 ccw(c0,0) 0,1377.95 ccw(c0,0) -1377.95,0 ; -39.37,312.49 ccw(c0,0) 39.37,312.49 39.37,354.33 ccw(c0,354.33) -39.37,354.33 -39.37,312.49

## Silkscreen, mask and mechanical layers (free items; w line width, h text height)
Top Overlay:
  drawing of 521 lines, arcs and shapes, not listed
  text "GND" at -601.25,15.91 h25
  text "TX" at -488.75,15.91 h25
  text "RX" at -388.75,15.91 h25
  text "Dome Board" at 583.41,-246.22 h80
  text "Rev B" at 688.18,-309.39 h80
Bottom Overlay:
  text "GND" at -534.6,0.8 h25
  text "TX" at -447.1,0.8 h25
  text "RX" at -347.1,0.8 h25
  text "OLogic" at 950.7,-274.49 h120
Mechanical 1:
  circle w0.5: c0,0 r1377.95
  lines w0.5: -39.37,312.49 ccw(c0,0) 39.37,312.49 39.37,354.33 ccw(c0,354.33) -39.37,354.33 -39.37,312.49